# Altium PCB PCB.PcbDoc
Units mm, origin at the board's own origin, x right, y up, seen from the top; angles counter-clockwise.
Board outline 18.54 x 22.61 mm, 2 copper layers (Top Layer, Bottom Layer), stack 1.621 mm thick; 8 components, 19 nets, 48 pads, 28 vias.
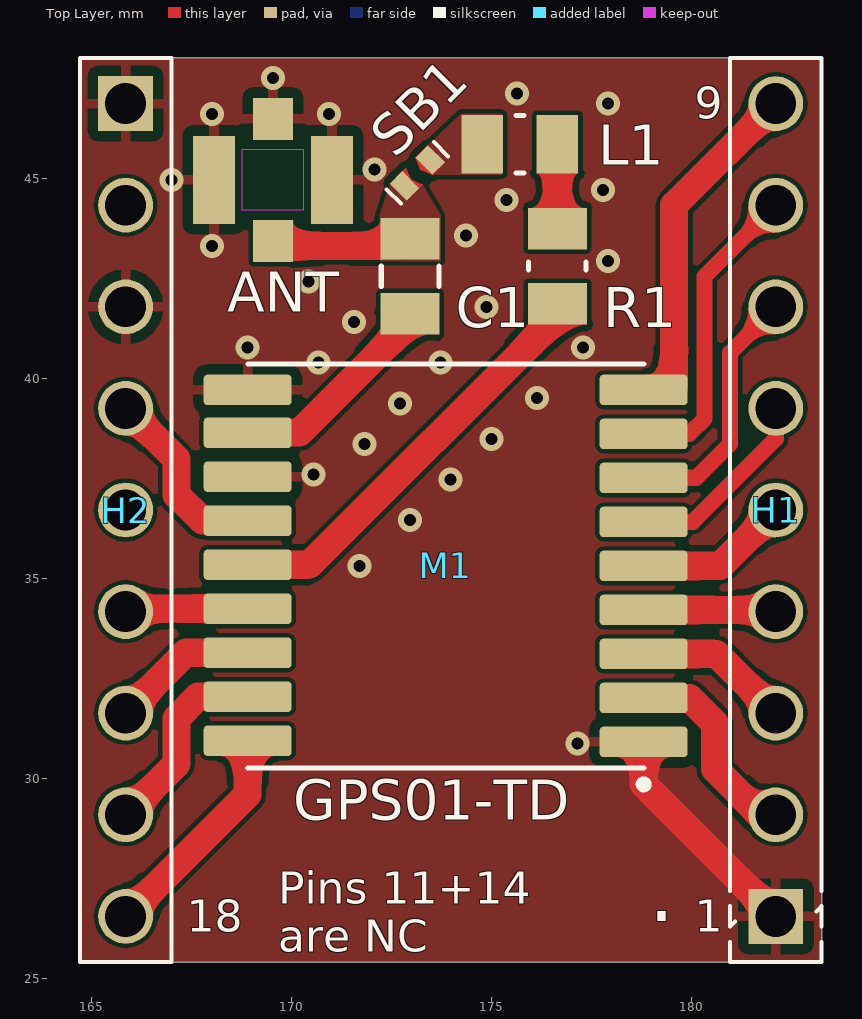
[diagram p0: Top Layer view]
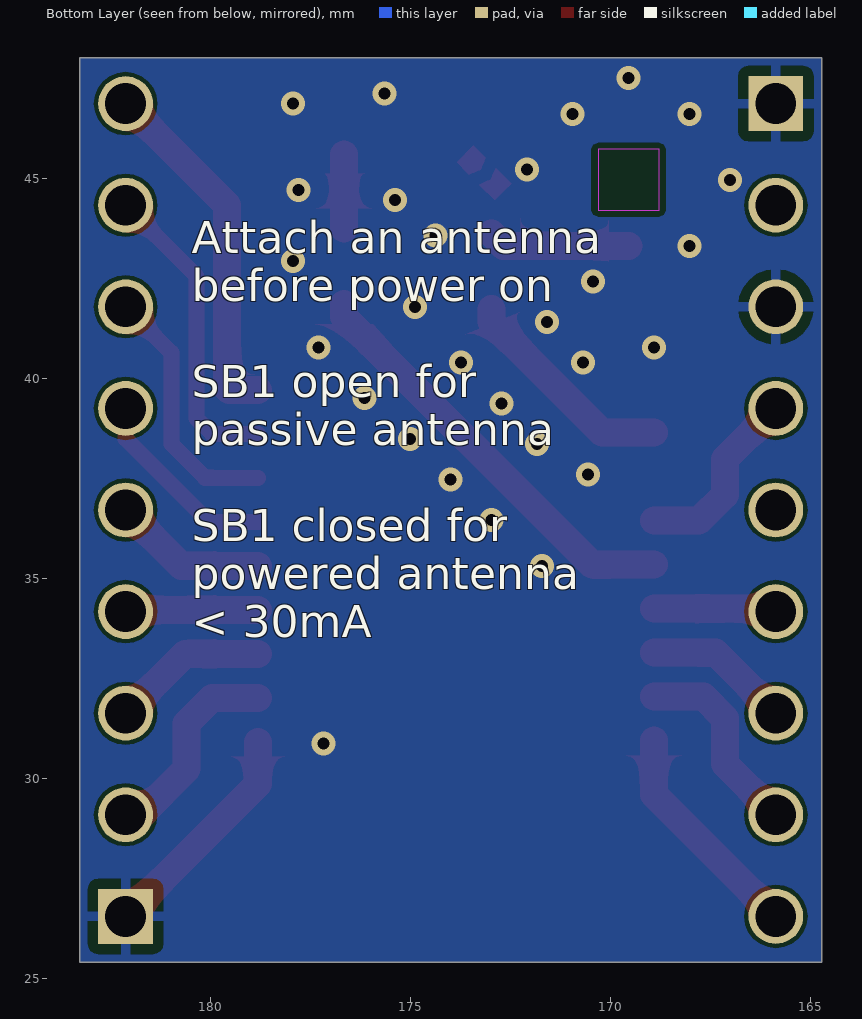
[diagram p1: Bottom Layer view, seen from below]
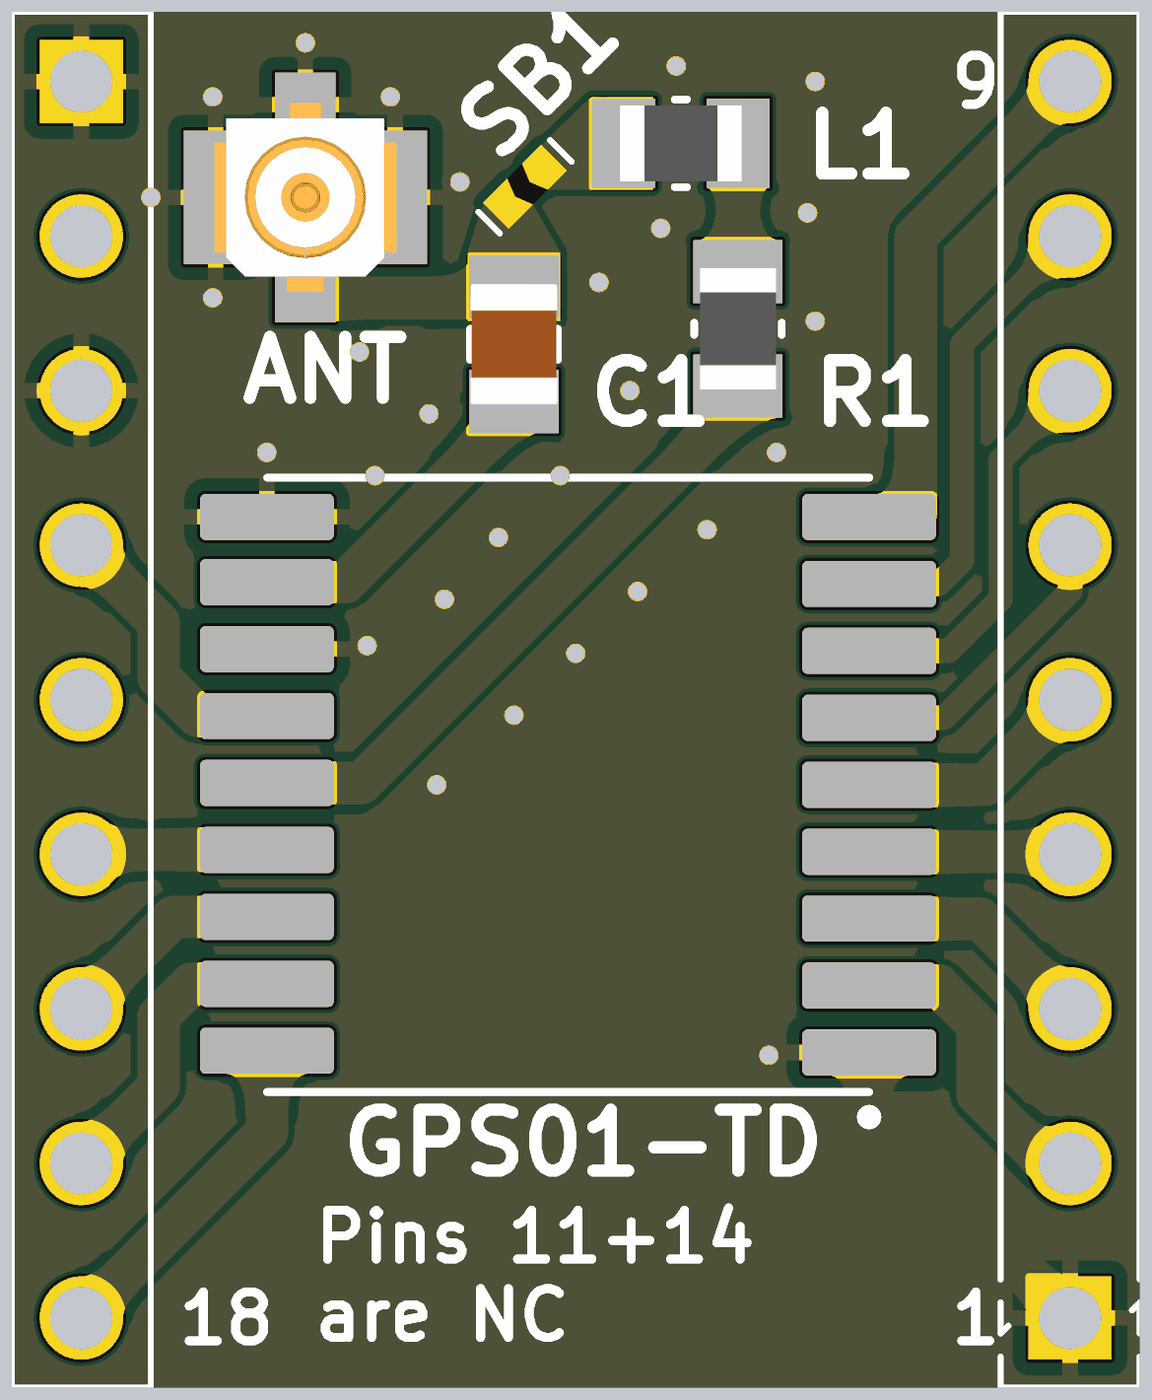
[diagram p2: 3D render of the assembled board from above, using the file's embedded part models]

## Layer stack, top to bottom
Top Solder: solder mask 0.0102, Solder Resist, Dk 3.5
Top Layer: signal copper 0.0356
Dielectric 1: dielectric 1.55, FR-4, Dk 4.8
Bottom Layer: signal copper 0.0356
Bottom Solder: solder mask 0.0102, Solder Resist, Dk 3.5

## Board outline
164.719,25.4 164.719,48.006 183.261,48.006 183.261,25.4

## Design rules (kind name [scope] priority, off if disabled: settings)
Clearance [All] p1: gap=0.152 ignorepadtopadclearanceinfootprint=FALSE except(0: Arc-Hole Track-Hole SMDPad-Hole THPad-Hole Via-Hole Fill-Hole Poly-Hole Region-Hole Text-Hole; 0.1: Arc-Poly Track-Poly SMDPad-Poly THPad-Poly Via-Poly Fill-Poly Poly-Poly)
HoleSize [All] p1: absolutevalues=TRUE maxlimit=6.2 minlimit=0.3 maxpercent=80.000 minpercent=20.000
MinimumSolderMaskSliver [All] p1: minsoldermaskwidth=0.1
PolygonConnect ViaConnect [IsVia] p1: connectstyle=Direct reliefconductorwidth=0.254 reliefentries=4 polygonreliefangle="90 Angle" airgapwidth=0.254
PolygonConnect "Thermal relief for GND" [InNet('1')] p2: connectstyle=Relief reliefconductorwidth=0.254 reliefentries=4 polygonreliefangle="90 Angle" airgapwidth=0.254
PolygonConnect [All] p3: connectstyle=Direct reliefconductorwidth=0.254 reliefentries=4 polygonreliefangle="90 Angle" airgapwidth=0.254
RoutingVias [All] p1: holewidth=0.3 width=0.6 viastyle="Through Hole" minholewidth=0.3 minwidth=0.5 maxholewidth=1 maxwidth=5
SilkToSilkClearance [All] p1: silktosilkclearance=0.1
SilkToSolderMaskClearance [IsPad] p1: minsilkscreentomaskgap=0.1 clearancetoexposedcopper=TRUE
SolderMaskExpansion [All] p1: expansion=0.051
Width [All] p1: maxlimit=25.4 minlimit=0.15 preferedwidth=0.3
26 further rules are at their usual default settings.

## Components (designator, comment, footprint, x,y, rotation, side; value= is the part's Value field where it differs from the comment)
ANT "CONMHF1-SMD-T" TE_CONMHF1-SMD-T 169.545,44.958 r180 top
C1 "47pF" CAPACITOR_0805_2012M-70N 172.974,42.545 r270 top
H1 "HDR,2.54mm,1x9" HEADER_2.54MM_1x9PIN 182.118,36.703 r90 top
H2 "HDR,2.54mm,1x9" HEADER_2.54MM_1x9PIN 165.862,36.703 r270 top
L1 "47nH" RESISTOR_0805_2012M-50N 175.717,45.847 r0 top
M1 "GPS01-TD" GPS01-TD 173.863,35.306 r180 top
R1 "10R" RESISTOR_0805_2012M-50N 176.657,42.799 r270 top
SB1 "Solder Jumper Normally Open" "Solder Bridge Chevron 0402 Open" 173.154,45.132 r225 top

## Footprints (in the part's own frame and the unit in brackets; to place one, negate y for a bottom-side part, rotate by r counter-clockwise, add the part's x,y. Pads: shape width x height; smd on the part's side, far side on the other; paste and mask are expansions set on the pad)
CAPACITOR_0805_2012M-70N [mm] "Capacitor, 0805 (2012 metric), 0.7mm high, nominal pads,"
  rect 1.04x1.47 smd mask+0.051: 1(-0.94,0) 2(0.94,0)
  silkscreen extent -0.25,-0.72 0.25,0.72, body extent -1,-0.73 1,0.73, height 1.23
GPS01-TD [mm]
  rrect25% 2.2x0.76 smd: 1(-4.95,4.4) 2(-4.95,3.3) 3(-4.95,2.2) 4(-4.95,1.1) 5(-4.95,0) 6(-4.95,-1.1) 7(-4.95,-2.2) 8(-4.95,-3.3) 9(-4.95,-4.4) 10(4.95,-4.4) 11(4.95,-3.329) 12(4.95,-2.229) 13(4.95,-1.129) 14(4.95,-0.029) 15(4.95,1.071) 16(4.95,2.171) 17(4.95,3.271) 18(4.95,4.371)
  silkscreen extent -5.05,-5.05 4.95,5.56, body extent -4.95,-5.05 4.95,5.05, height 2
HEADER_2.54MM_1x9PIN [mm]
  rect 1.37x1.37 hole 1.02: 1(-10.16,0)
  round 1.37 hole 1.02: 2(-7.62,0) 3(-5.08,0) 4(-2.54,0) 5(0,0) 6(2.54,0) 7(5.08,0) 8(7.62,0) 9(10.16,0)
  silkscreen extent -11.3,-1.14 11.3,1.14, body extent -11.3,-1.14 11.3,1.14, height 8.2
RESISTOR_0805_2012M-50N [mm] "Resistor, 0805 (2012 metric), nominal pads"
  rect 1.04x1.47 smd mask+0.051: 1(-0.94,0) 2(0.94,0)
  silkscreen extent -0.1,-0.72 0.1,0.72, body extent -1,-0.63 1,0.62, height 0.5
"Solder Bridge Chevron 0402 Open" [mm] "Small solder bridge. Open."
  rect 0.44x0.6 smd paste-2539.97 mask+0: 1(-0.457,0) 2(0.457,0)
  Top Layer region: -0.677,-0.3 -0.677,0.3 -0.237,0.3 -0.112,0 -0.237,-0.3
  Top Layer region: 0.677,-0.3 0.677,0 0.227,0 0.113,-0.3
  Top Layer region: 0.677,0.3 0.677,0 0.227,0 0.113,0.3
  silkscreen extent -0.83,-0.25 0.83,0.25
TE_CONMHF1-SMD-T [mm]
  rect 1x1.05 smd: 1(0,1.525) 4(0,-1.525)
  rect 1.05x2.2 smd: 2(-1.475,0) 3(1.475,0)
  Keep-Out Layer region: 0.762,-0.763 -0.762,-0.763 -0.762,0.761 0.762,0.761
  body extent -1.5,-1.55 1.5,1.55, height 1.31

## Part data
ANT: Package=None, Availability=Unavailable, MP=CONMHF1-SMD-T, Price=None
C1: library part "Generic Capacitor", "Passive - Capacitor, Generic", Tolerance=1%
H1 H2: "Connector - 2.54mm, 1x9-pin"
L1: library part "Generic Inductor", "Passive - Inductor, Generic"
R1: library part "Generic Resistor", "Passive - Resistor, Generic", Tolerance=?%
SB1: DEBUG=DEBUG

## Via types
v1: diameter 0.6, hole 0.3, Top Layer to Bottom Layer, tented both sides, 28 vias

## Nets (pads, with @x,y where several pads share a name; then routed paths per layer and width w, separated by ;. In a path a pad name is that pad's centre, name@x,y a point inside that pad or via, vN(x,y) a via of type N, cw(c..) or ccw(c..) an arc to the next point about the centre after c; other vN are vias at no path point)
1: ANT.2 ANT.3 ANT.4 H1.1 H2.1 H2.3 M1.1 M1.10 M1.12 | length 5.7
  Top Layer w0.7: M1.1 178.813,29.848 H1.1
  other v1: 177.165,30.861 171.704,35.306 172.974,36.449 173.99,37.465 170.561,37.592 171.831,38.354 175.006,38.481 172.72,39.37 176.149,39.497 170.688,40.386 173.736,40.386 168.91,40.767 177.292,40.767 171.577,41.402 174.879,41.783 170.434,42.418 177.927,42.926 168.021,43.307 174.371,43.561 175.387,44.45 177.8,44.704 167.005,44.958 172.085,45.212 168.021,46.609 170.942,46.609 177.927,46.863 175.641,47.117 169.545,47.498
2: H1.2 M1.2 | length 5.2
  Top Layer w0.7: M1.2 179.957,32.006 180.594,31.369 180.594,30.225 181.736,29.083 H1.2
3: H1.3 M1.3 | length 3.9
  Top Layer w0.7: M1.3 180.635,33.106 H1.3
4: H1.4 M1.4 | length 3.3
  Top Layer w0.7: M1.4 182.075,34.206 H1.4
5: H1.5 M1.5 | length 3.9
  Top Layer w0.7: M1.5 180.721,35.306 H1.5
6: H1.6 M1.6 | length 4.9
  Top Layer w0.4: M1.6 180.043,36.406 182.118,38.481 H1.6
7: H1.7 M1.7 | length 6.4
  Top Layer w0.4: M1.7 180.127,37.506 180.975,38.354 180.975,40.64 H1.7
8: H1.8 M1.8 | length 7.8
  Top Layer w0.4: M1.8 179.957,38.606 180.34,38.989 180.34,42.545 H1.8
9: H1.9 M1.9 | length 8.9
  Top Layer w0.7: M1.9 179.533,39.706 179.578,39.751 179.578,44.323 H1.9
13: H2.4 M1.13 | length 4.7
  Top Layer w0.7: H2.4 167.132,37.973 167.132,37.084 167.781,36.435 M1.13
15: H2.6 M1.15 | length 3.1
  Top Layer w0.7: H2.6 165.934,34.235 M1.15
16: H2.7 M1.16 | length 3.7
  Top Layer w0.7: H2.7 167.374,33.135 M1.16
17: H2.8 M1.17 | length 4.9
  Top Layer w0.7: H2.8 167.132,30.353 167.132,31.496 167.671,32.035 M1.17
18: H2.9 M1.18 | length 5.7
  Top Layer w0.7: H2.9 168.913,29.594 M1.18
NetANT_1: ANT.1 C1.1 SB1.2 | length 3.6
  Top Layer w0.7: ANT.1@169.545,43.306 172.668,43.306 C1.1@172.974,43.612
NetC1_2: C1.2 M1.11 | length 5.5
  Top Layer w0.7: M1.11 170.207,38.635 172.974,41.402 C1.2 C1.2@172.974,41.732
NetL1_1: L1.1 SB1.1
NetL1_2: L1.2 R1.1 | length 1.9
  Top Layer w0.7: R1.1 L1.2@176.657,45.593
NetM1_14: M1.14 R1.2 | length 10.6
  Top Layer w0.7: M1.14 170.463,35.335 176.657,41.529 R1.2
pads on no net: H2.2 H2.5

## Polygon pours and split planes (outlines as drawn)
NetL1_1 on Top Layer "NetL1_1" (solid, pour order 0): 174.244,46.609 173.421,45.823 173.109,45.51 173.233,45.211 173.534,45.085 174.244,45.085 175.26,45.085 175.26,46.609
NetANT_1 on Top Layer "11" (solid, pour order 2): 172.463,44.866 172.212,44.069 172.212,42.926 173.736,42.926 173.736,44.069 173.287,44.84 172.993,44.971
1 on Top Layer "GND" (solid, pour order 6): 164.719,48.006 183.261,48.006 183.261,25.4 164.719,25.4
1 on Bottom Layer "GND_BOTTOM" (solid, pour order 4): 164.719,48.006 183.261,48.006 183.261,25.4 164.719,25.4

## Silkscreen, mask and mechanical layers (free items; w line width, h text height)
Top Overlay:
  text "9" at 180.086,46.482 h0.8
  text "GPS01-TD" at 170.053,28.956 h1
  text "." at 178.943,26.416 h1.5
  text "18" at 167.386,26.162 h0.8
  text "1" at 180.086,26.162 h0.8
  text "Pins 11+14  / are NC" at 169.672,25.654 h0.8
Bottom Overlay:
  text "Attach an antenna  / before power on /  / SB1 open for / passive antenna /    / SB1 closed for / powered antenna / < 30mA" at 180.467,33.528 h0.8
Board Outline:
  the board outline again, w0.25